# EAGLE board 4ButtonSwitch.ItsyBitsyM0.Rev1.0 (EAGLE 8.6.0)
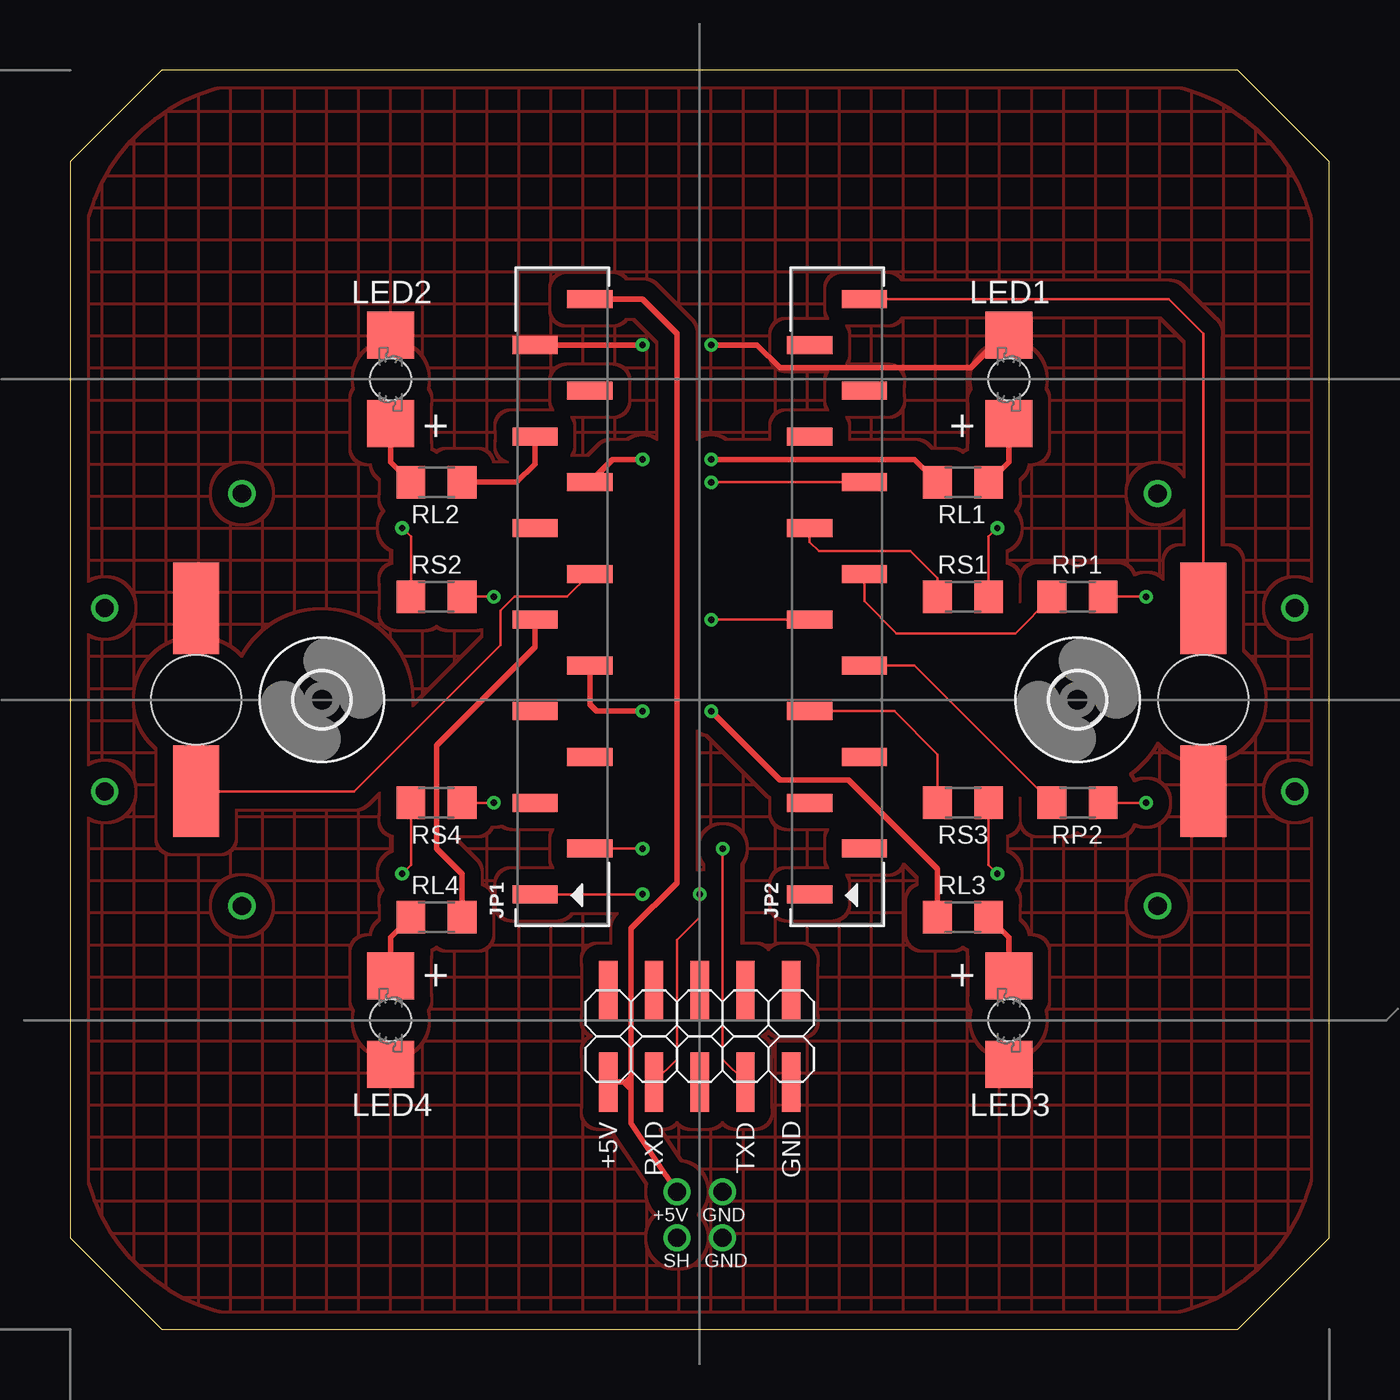
[diagram p0: board, top side]
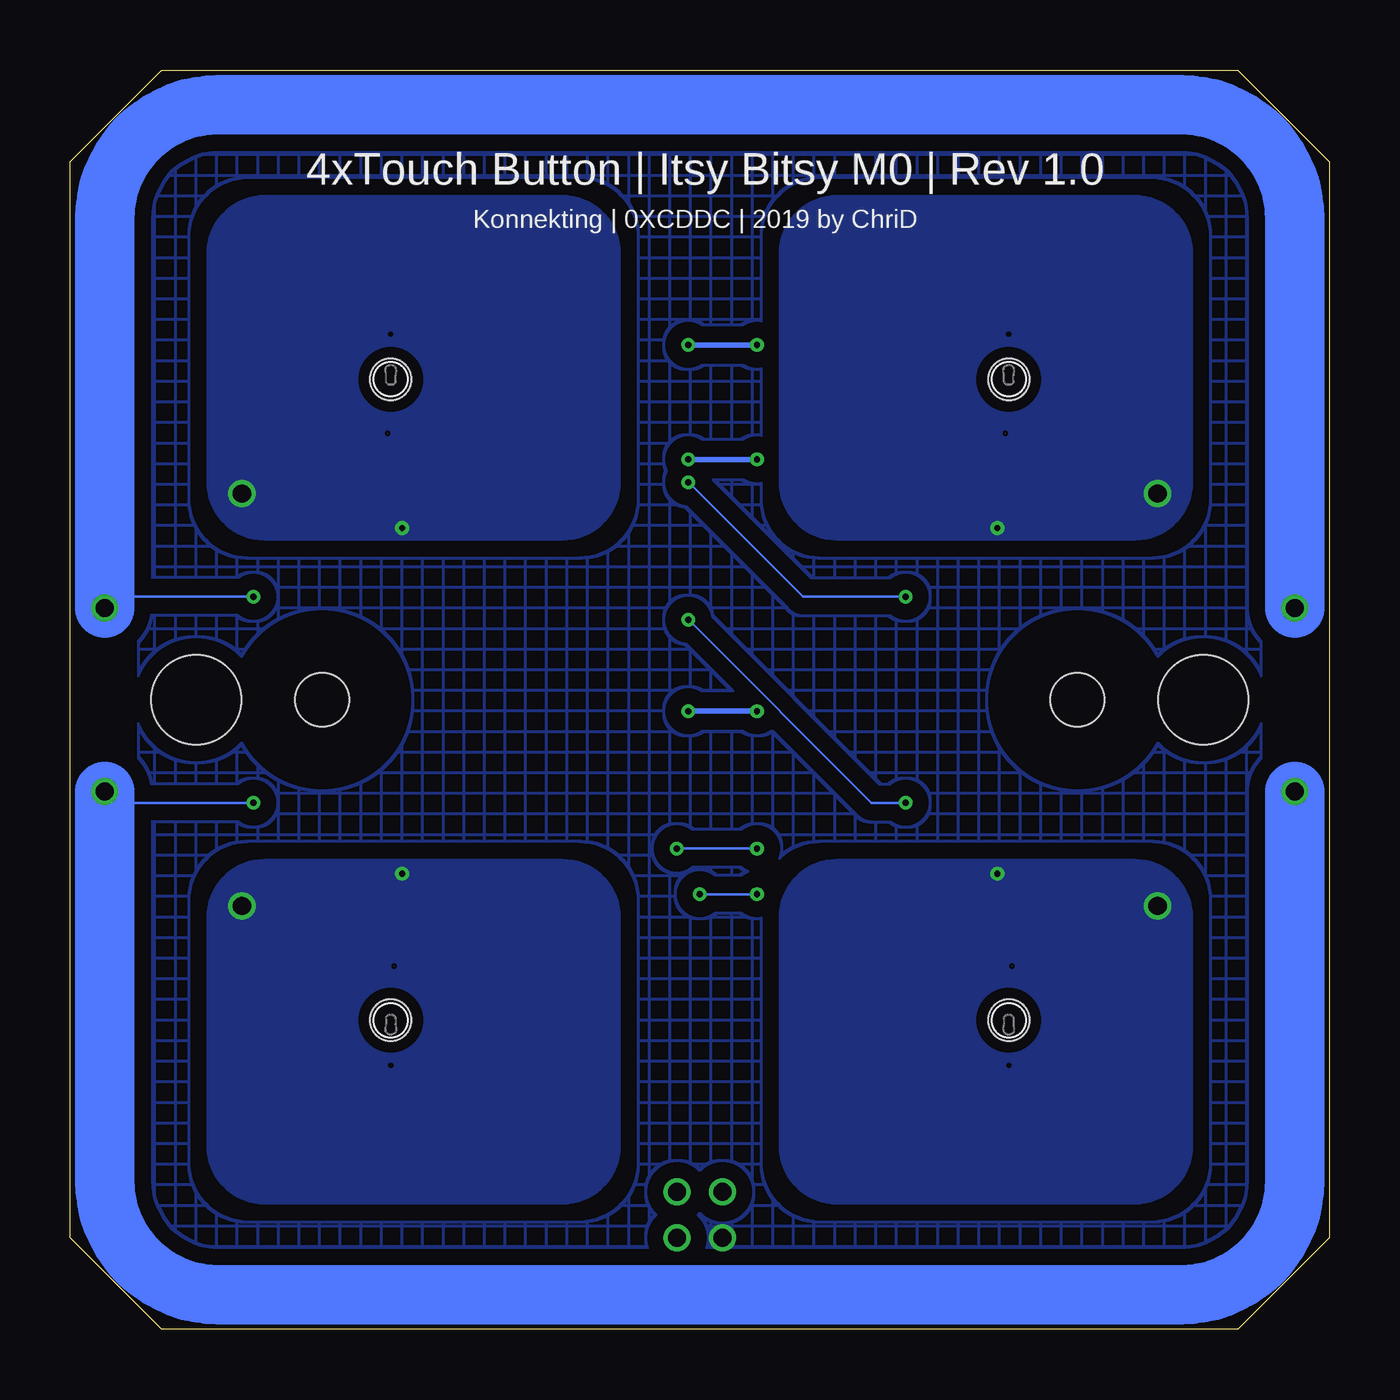
[diagram p1: board, bottom side, seen from below]

Size 69.85 x 69.85 mm. Coordinates in mm from the lower left corner, seen from the top.
Outline: 5.08,69.85 64.77,69.85 69.85,64.77 69.85,5.08 64.77,0 5.08,0 0,5.08 0,64.77 5.08,69.85
Outline: 6.34,69.84 5.08,69.85
Copper layers (1*16): Top 0.035mm / dielectric 1.5mm / Bottom 0.035mm
Design rules "konnektduino": minimum track width 6mil, minimum drill 0.35mm, track to track 6mil, track to pad 6mil, pad to pad 6mil, via to via 6mil, smd to smd 6mil, copper to edge 25mil, drill to drill 6mil, minimum pad ring 10mil, minimum via ring 8mil, stop-mask expansion 1mil, vias tented up to drill 25mil, thermal gap 10mil
Holes 5 mm at 62.87,34.92 6.99,34.92

## Footprints (pad centres in the part's own frame; a part is rotated, then mirrored left to right if it is on the bottom)
SMD2,54-5,08 = smd 2.54 x 5.08: 1 0,0
1X14_SMT = smd 1 x 2.5: 1 -16.51,1.52; 2 -13.97,-1.52; 3 -11.43,1.52; 4 -8.89,-1.52; 5 -6.35,1.52; 6 -3.81,-1.52; 7 -1.27,1.52; 8 1.27,-1.52; 9 3.81,1.52; 10 6.35,-1.52; 11 8.89,1.52; 12 11.43,-1.52; 13 13.97,1.52; 14 16.51,-1.52
P47F-BOTTOM = smd 2.6 x 2.6: A -2.45,0; C 2.45,0 | hole 2.3: 0,0
R1206 = smd 1.6 x 1.803: 1 -1.422,0; 2 1.422,0
2X05SMD = smd 1.016 x 3.302: 1 -1.27,-3.81; 2 -1.27,1.27; 3 1.27,-3.81; 4 1.27,1.27; 5 3.81,-3.81; 6 3.81,1.27; 7 6.35,-3.81; 8 6.35,1.27; 9 8.89,-3.81; 10 8.89,1.27
3,0 = hole 3: 0,0

## Placement (x,y rotation side)
GND_NRST  0  [SMD2,54-5,08]  6.99,40.01 0 top
GND_PRG  0  [SMD2,54-5,08]  62.87,29.84 0 top
JP1  [1X14_SMT]  27.3,40.64 90 top
JP2  [1X14_SMT]  42.55,40.64 90 top
LED1  LWP4-BOTTOM  [P47F-BOTTOM]  52.07,52.7 90 top
LED2  LWP4-BOTTOM  [P47F-BOTTOM]  17.78,52.7 90 top
LED3  LWP4-BOTTOM  [P47F-BOTTOM]  52.07,17.14 270 top
LED4  LWP4-BOTTOM  [P47F-BOTTOM]  17.78,17.14 270 top
PAD_NRST  0  [SMD2,54-5,08]  62.87,40.01 0 top
PAD_PRG  0  [SMD2,54-5,08]  6.99,29.84 0 top
RL1  330E  [R1206]  49.53,46.99 0 top
RL2  330E  [R1206]  20.32,46.99 180 top
RL3  330E  [R1206]  49.53,22.86 0 top
RL4  330E  [R1206]  20.32,22.86 180 top
RP1  1k  [R1206]  55.88,40.64 180 top
RP2  1k  [R1206]  55.88,29.21 180 top
RS1  1k  [R1206]  49.53,40.64 180 top
RS2  1k  [R1206]  20.32,40.64 0 top
RS3  1k  [R1206]  49.53,29.21 180 top
RS4  1k  [R1206]  20.32,29.21 0 top
SAM12235-ND  SIEMENS BCU  [2X05SMD]  31.11,17.53 0 top
U$1  [3,0]  13.97,34.92 0 top
U$2  [3,0]  55.88,34.92 0 top

## Library data of the parts
GND_NRST GND_PRG PAD_NRST PAD_PRG = wirepad
JP1 JP2 = pinhead+
LED1-LED4 = led
RL1-RL4 RP1 RP2 RS1-RS4 = resistor
SAM12235-ND = pinhead
U$1 U$2 = holes

## Nets
+3V3: JP2.13
+5V: JP1.14 SAM12235-ND.1
A0: JP2.10 RS2.2
A1: JP2.9 RS1.2
A2: JP2.8 RP1.2
A3: JP2.7 RS4.2
A4: JP2.6 RP2.2
A5: JP2.5 RS3.2
D7: JP1.6 RL3.1
D9: JP1.7 RL4.1
D10: JP1.8 PAD_PRG.1
D11: JP1.9
D12: JP1.10 RL1.1
D13: JP1.11 RL2.1
GND: GND_NRST.1 GND_PRG.1 JP1.13 LED1.C LED2.C LED3.C LED4.C SAM12235-ND.9
N$19: LED1.A RL1.2
N$20: LED2.A RL2.2
N$21: LED3.A RL3.2
N$22: LED4.A RL4.2
RESET: JP2.14 PAD_NRST.1
SCL: JP1.4
SDA: JP1.3
SENS_1: RS1.1
SENS_2: RS2.1
SENS_3: RS3.1
SENS_4: RS4.1
SENS_PROX_1: RP1.1
SENS_PROX_2: RP2.1
USART1_RX: JP1.1 SAM12235-ND.3
USART1_TX: JP1.2 SAM12235-ND.7

## Tracks (layer width: path | path; a pad name or v marks a point on that pad's centre or on a via)
+5V  (via drill 1)
  Top 0.305: SAM12235-ND.1 30.73,13.72 | 30.73,13.72 30.86,13.72 31.11,13.97 | 31.11,13.97 31.11,22.23 33.66,24.77 33.66,55.24 31.75,57.15 JP1.14 | v33.66,7.62 31.11,11.43 31.11,13.34 | 31.11,13.34 31.11,13.97 | 30.73,13.72 31.11,13.34
A0  (via drill 0.35)
  Top 0.152: JP2.10 v35.56,46.99 | v23.5,40.64 RS2.2
  Bottom 0.152: v35.56,46.99 29.21,40.64 v23.5,40.64
A1
  Top 0.152: JP2.9 41.02,43.68 41.53,43.18 46.61,43.18 48.11,41.68 RS1.2
A2
  Top 0.152: JP2.8 44.06,40.39 45.85,38.61 52.43,38.61 RP1.2
A3  (via drill 0.35)
  Top 0.152: JP2.7 v35.56,39.37 | v23.5,29.21 RS4.2
  Bottom 0.152: v35.56,39.37 25.4,29.21 v23.5,29.21
A4
  Top 0.152: JP2.6 46.84,36.83 RP2.2
A5
  Top 0.152: RS3.2 48.11,31.9 45.72,34.29 JP2.5
D7  (via drill 0.35)
  Top 0.305: JP1.6 28.82,34.67 29.21,34.29 v31.75,34.29 | v35.56,34.29 39.37,30.48 43.18,30.48 48.11,25.55 RL3.1
  Bottom 0.305: v31.75,34.29 v35.56,34.29
D9
  Top 0.305: RL4.1 21.74,25.25 20.32,26.67 20.32,32.38 25.79,37.85 JP1.7
D10
  Top 0.152: JP1.8 27.55,40.64 24.64,40.64 23.88,39.88 23.88,37.97 15.75,29.84 PAD_PRG.1
D12  (via drill 0.35)
  Top 0.305: RL1.1 46.84,48.26 v35.56,48.26 | v31.75,48.26 30.09,48.26 29.65,47.82 JP1.10
  Bottom 0.305: v35.56,48.26 v31.75,48.26
D13
  Top 0.305: JP1.11 25.79,48.01 24.77,46.99 RL2.1
GND  (via drill 0.35, 1)
  Top 0.305: JP1.13 v31.75,54.61 | v35.56,54.61 38.1,54.61 39.37,53.34 49.97,53.34 51.27,54.64 51.56,54.64 LED1.C
  Bottom 0.305: v31.75,54.61 v35.56,54.61
  other vias: 36.2,7.62 36.2,5.08
  pour Top (isolate 0.889, rank 6, no thermals, hatched): 0.64,10.79 arc90 10.79,0.64 59.05,0.64 arc90 69.22,10.79 69.22,59.05 arc90 59.05,69.22 10.79,69.22 arc90 0.64,59.05
N$19
  Top 0.305: LED1.A 52.07,48.11 RL1.2
N$20
  Top 0.305: LED2.A 17.78,48.11 RL2.2
N$21
  Top 0.305: LED3.A 52.07,21.74 RL3.2
N$22
  Top 0.305: LED4.A 17.78,21.74 RL4.2
RESET
  Top 0.152: PAD_NRST.1 62.87,55.24 60.96,57.15 JP2.14
SENS_1  (via drill 0.35, 1)
  Top 0.152: RS1.1 50.95,43.97 v51.44,44.45
  other vias: 60.33,46.35
  pour Bottom: 39.37,59.69 39.37,46.99 arc90 42.55,43.81 59.05,43.81 arc90 62.23,46.99 62.23,59.69 arc90 59.05,62.87 42.55,62.87 arc90
SENS_2  (via drill 0.35, 1)
  Top 0.152: RS2.1 18.9,43.97 v18.41,44.45
  other vias: 9.53,46.35
  pour Bottom: 10.79,43.81 27.3,43.81 arc90 30.48,46.99 30.48,59.69 arc90 27.3,62.87 10.79,62.87 arc90 7.62,59.69 7.62,46.99 arc90
SENS_3  (via drill 0.35, 1)
  Top 0.152: RS3.1 50.95,25.76 v51.44,25.27
  other vias: 60.33,23.5
  pour Bottom: 59.05,26.04 42.55,26.04 arc90 39.37,22.86 39.37,10.16 arc90 42.55,6.99 59.05,6.99 arc90 62.23,10.16 62.23,22.86 arc90
SENS_4  (via drill 0.35, 1)
  Top 0.152: RS4.1 18.9,25.76 v18.41,25.27
  other vias: 9.53,23.5
  pour Bottom: 7.62,10.16 7.62,22.86 arc-90 10.79,26.04 27.3,26.04 arc-90 30.48,22.86 30.48,10.16 arc-90 27.3,6.99 10.79,6.99 arc-90
SENS_PROX_1  (via drill 0.35, 1)
  Top 0.152: RP1.1 v59.69,40.64
  Bottom 0.152: v67.94,40.01 67.31,40.64 v59.69,40.64
  Bottom 3.302: v1.91,40.01 1.91,61.59 arc-90 8.26,67.94 61.59,67.94 arc-90 67.94,61.59 v67.94,40.01
SENS_PROX_2  (via drill 0.35, 1)
  Top 0.152: RP2.1 v59.69,29.21
  Bottom 0.152: v59.69,29.21 67.31,29.21 v67.94,29.84
  Bottom 3.302: v1.91,29.84 1.91,8.26 arc90 8.26,1.91 61.59,1.91 arc90 67.94,8.26 v67.94,29.84
SHIELD_OR_GND  (via drill 1)
  other vias: 33.66,5.08
  pour Bottom (isolate 0.889, rank 6, no thermals, hatched): 3.81,9.53 arc90 9.53,3.81 60.33,3.81 arc90 66.04,9.53 66.04,60.33 arc90 60.33,66.04 9.53,66.04 arc90 3.81,60.33
USART1_RX  (via drill 0.35)
  Top 0.152: JP1.1 v31.75,24.13 | v34.92,24.13 34.92,22.86 33.66,21.59 33.66,14.99 SAM12235-ND.3
  Bottom 0.152: v31.75,24.13 v34.92,24.13
USART1_TX  (via drill 0.35)
  Top 0.152: JP1.2 v31.75,26.67 | v36.2,26.67 36.2,14.99 SAM12235-ND.7
  Bottom 0.152: v31.75,26.67 v36.2,26.67

## Text on the board
tNames: + | + | + | + | +5V | RXD | TXD | GND | +5V | GND | SH | GND
bNames: 4xTouch Button | Itsy Bitsy M0 | Rev 1.0 | Konnekting | 0XCDDC | 2019 by ChriD